# Altium PCB KlokWave.PcbDoc
Units mil, origin at the board's own origin, x right, y up, seen from the top; angles counter-clockwise.
Board outline 9135 x 4645 mil, 2 copper layers (Top Layer, Bottom Layer); 115 components, 91 nets, 369 pads, 13 vias.
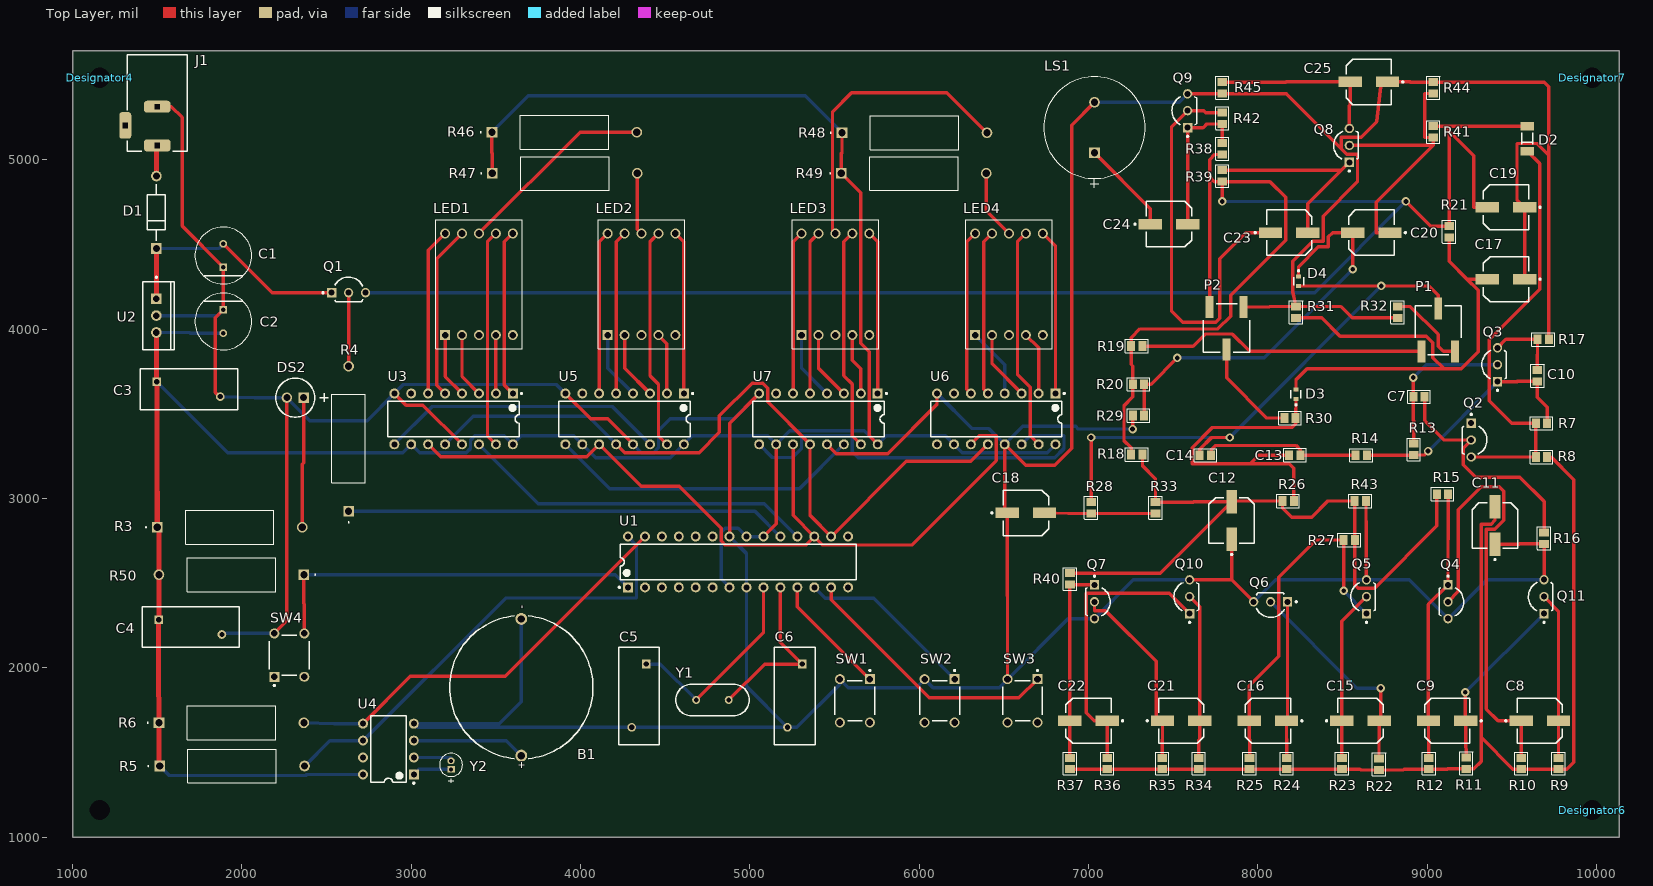
[diagram p0: Top Layer view]
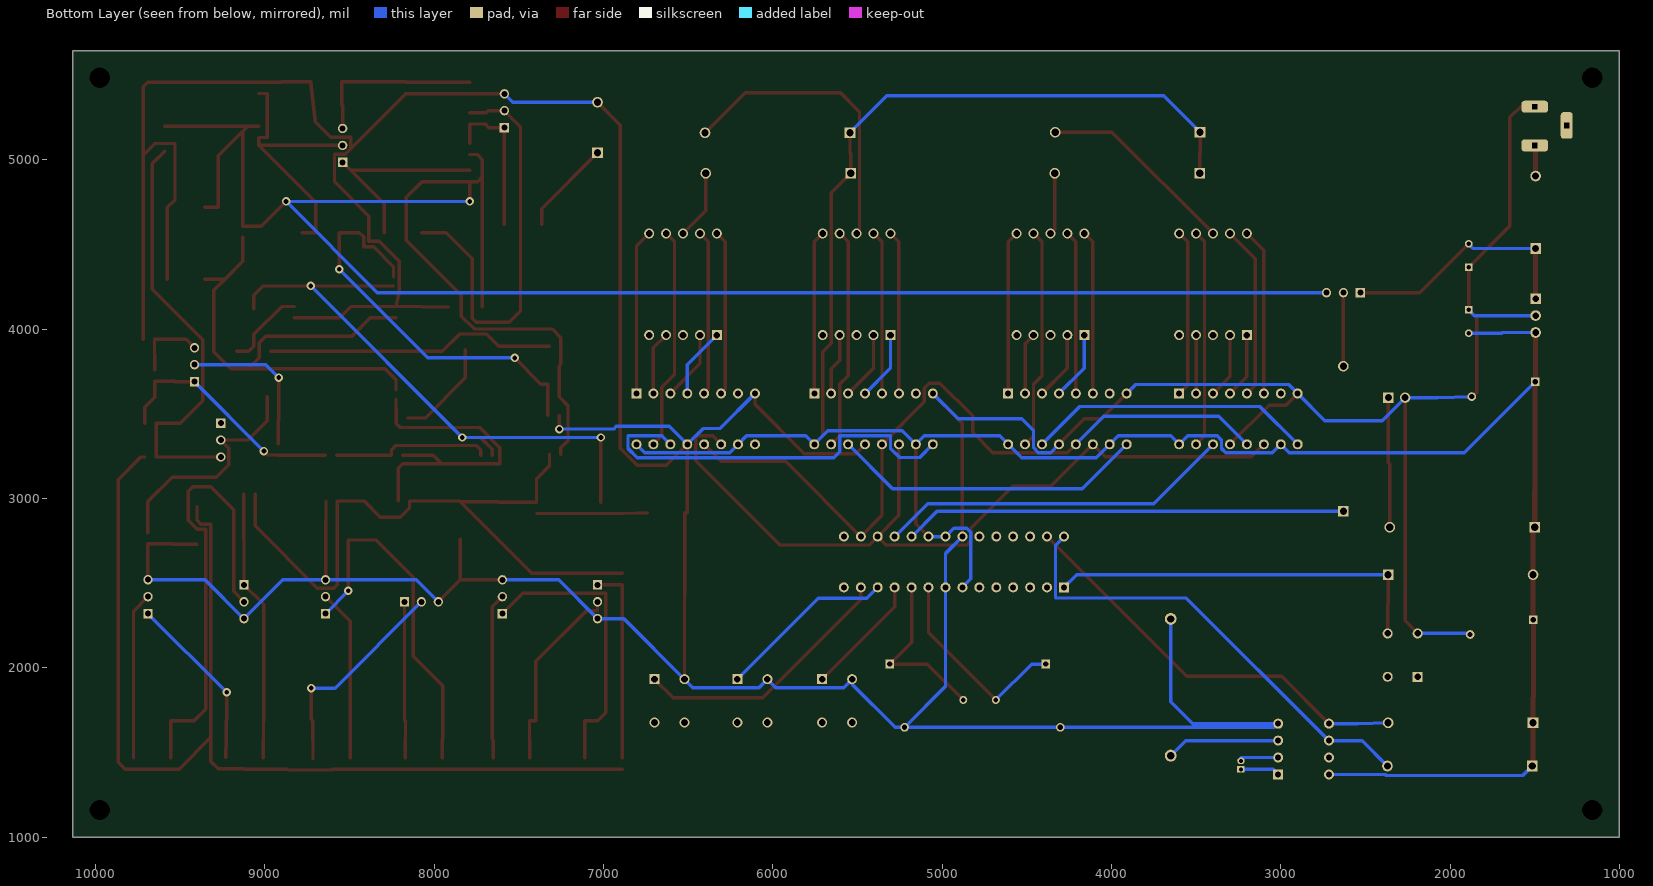
[diagram p1: Bottom Layer view, seen from below]

## Layer stack, top to bottom
Top Solder: solder mask 0.4, Solder Resist, Dk 3.5
Top Layer: signal copper 1.4
Dielectric 1: dielectric 12.6, FR-4, Dk 4.8
Bottom Layer: signal copper 1.4
Bottom Solder: solder mask 0.4, Solder Resist, Dk 3.5

## Board outline
1000,1000 10135,1000 10135,5645 1000,5645

## Design rules (kind name [scope] priority, off if disabled: settings)
Clearance Clearance_1 [All] p1: gap=10 ignorepadtopadclearanceinfootprint=FALSE
Clearance [All] p2: gap=10 ignorepadtopadclearanceinfootprint=FALSE
PolygonConnect [All] p1: connectstyle=Relief reliefconductorwidth=10 reliefentries=4 polygonreliefangle="90 Angle" airgapwidth=10
RoutingVias [All] p1: holewidth=28 width=50 viastyle="Through Hole" minholewidth=28 minwidth=50 maxholewidth=28 maxwidth=50
SilkToSolderMaskClearance [IsText] p1: minsilkscreentomaskgap=10 clearancetoexposedcopper=TRUE
SolderMaskExpansion [All] p1: expansion=4 istentingtop=FALSE
SupplyNets "Schematic Supply Nets_1" [InNet('VCC')] p1: voltage=0.000
SupplyNets "Schematic Supply Nets" [InNet('GND')] p2: voltage=0.000
Width [All] p1: maxlimit=30 minlimit=20 preferedwidth=20 minimp=50.000000 maximp=50.000000 favimp=50.000000
29 further rules are at their usual default settings.

## Classes and differential pairs
component class KlokWave.Wave: C7 C8 C9 C10 C11 C12 C13 C14 C15 C16 C17 C18 C19 C20 C21 C22 C23 C24 C25 D2 D3 D4 LS1 P1 P2 Q2 Q3 Q4 Q5 Q6 Q7 Q8 Q9 Q10 Q11 R7 R8 R9 R10 R11 R12 R13 R14 R15 R16 R17 R18 R19 R20 R21 R22 R23 R24 R25 R26 R27 R28 R29 R30 R31 R32 R33 R34 R35 R36 R37 R38 R39 R40 R41 R42 R43 R44 R45
component class KlokWave.Klok: B1 C1 C2 C3 C4 C5 C6 D1 DS2 J1 Q1 R3 R4 R5 R6 U1 U2 U3 U4 U5 U6 U7 Y1 Y2
component class KlokWave.Display: LED1 LED2 LED3 LED4 R46 R47 R48 R49 R50 SW1 SW2 SW3 SW4

## Components (designator, comment, footprint, x,y, rotation, side; value= is the part's Value field where it differs from the comment)
B1 "CR-2032/HFN" "THT 3VBAT: PANA-CR-2032HFN" 3650,1885 r90 top
C1 "16SEPC150MD" "THT PolCondensator FP-OS-CON-TH-E7-d_0_45-MFG" 1890,4435 r90 top
C2 "16SEPC150MD" "THT PolCondensator FP-OS-CON-TH-E7-d_0_45-MFG" 1890,4045 r270 top
C3 "565R30GASS33" "THT NonPol CerCOndensator: FP-565R30GASS33-MFG" 1685,3645 r0 top
C4 "565R30GASS33" "THT NonPol CerCOndensator: FP-565R30GASS33-MFG" 1695,2240 r0 top
C5 "565R30GASS33" "THT NonPol CerCOndensator: FP-565R30GASS33-MFG" 4345,1835 r270 top
C6 "565R30GASS33" "THT NonPol CerCOndensator: FP-565R30GASS33-MFG" 5265,1835 r270 top
C7 "CL21C221FBANNNC" "SMD RES: 0805ph" 8951.54,3600 r180 top
C8 "FP-OS-CON-SMT-C6-MFG" "SMD Elco pol: FP-OS-CON-SMT-C6-MFG" 9665,1686.88 r0 top
C9 "FP-OS-CON-SMT-C6-MFG" "SMD Elco pol: FP-OS-CON-SMT-C6-MFG" 9117.83,1686.88 r180 top
C10 "CL21C221FBANNNC" "SMD RES: 0805ph" 9650,3725 r90 top
C11 "FP-OS-CON-SMT-C6-MFG" "SMD Elco pol: FP-OS-CON-SMT-C6-MFG" 9400,2840 r90 top
C12 "FP-OS-CON-SMT-C6-MFG" "SMD Elco pol: FP-OS-CON-SMT-C6-MFG" 7845,2870 r90 top
C13 "CL21C221FBANNNC" "SMD RES: 0805ph" 8218.46,3256 r180 top
C14 "CL21C221FBANNNC" "SMD RES: 0805ph" 7690,3255 r180 top
C15 "FP-OS-CON-SMT-C6-MFG" "SMD Elco pol: FP-OS-CON-SMT-C6-MFG" 8606.09,1686.88 r0 top
C16 "FP-OS-CON-SMT-C6-MFG" "SMD Elco pol: FP-OS-CON-SMT-C6-MFG" 8058.91,1686.88 r180 top
C17 "FP-OS-CON-SMT-C6-MFG" "SMD Elco pol: FP-OS-CON-SMT-C6-MFG" 9465.24,4295 r180 top
C18 "FP-OS-CON-SMT-C6-MFG" "SMD Elco pol: FP-OS-CON-SMT-C6-MFG" 6629.76,2915 r0 top
C19 "FP-OS-CON-SMT-C6-MFG" "SMD Elco pol: FP-OS-CON-SMT-C6-MFG" 9465,4720 r180 top
C20 "FP-OS-CON-SMT-C6-MFG" "SMD Elco pol: FP-OS-CON-SMT-C6-MFG" 8670,4570 r180 top
C21 "FP-OS-CON-SMT-C6-MFG" "SMD Elco pol: FP-OS-CON-SMT-C6-MFG" 7547.17,1686.88 r0 top
C22 "FP-OS-CON-SMT-C6-MFG" "SMD Elco pol: FP-OS-CON-SMT-C6-MFG" 7000,1686.88 r180 top
C23 "FP-OS-CON-SMT-C6-MFG" "SMD Elco pol: FP-OS-CON-SMT-C6-MFG" 8185,4570 r0 top
C24 "FP-OS-CON-SMT-C6-MFG" "SMD Elco pol: FP-OS-CON-SMT-C6-MFG" 7475,4620 r0 top
C25 "FP-OS-CON-SMT-C6-MFG" "SMD Elco pol: FP-OS-CON-SMT-C6-MFG" 8655,5460 r180 top
D1 "1N4007-E3/53" "THT Diode FP-1N4007-E3-53-MFG" 1495,4690 r90 top
D2 "TMMBAT48FILM" "SMD Diode BAT48 FP-MINIMELF-MFG" 9590,5125 r90 top value=20pF
D3 "1N4148WT-7" "SMD Diode Rect: FP-SOD523-MFG" 8225,3615 r90 top
D4 "1N4148WT-7" "SMD Diode Rect: FP-SOD523-MFG" 8240,4282.56 r270 top
Designator4 "Comment" "M3 Hole" 1160,5485 r0 top
Designator6 "Comment" "M3 Hole" 9975,1160 r0 top
Designator7 "Comment" "M3 Hole" 9975,5485 r0 top
DS2 "HLMP-3301" "THT LED: AVAG-HLMP-3301-2" 2365,3595 r180 top
J1 "694108106102" "THT DC Power Jack: 694106301002" 1500,5335 r180 top
LED1 "SA56-11EWA" "THT 7Seg: LED10_SA56-11EWA_KNB" 3200,3965 r90 top
LED2 "SA56-11EWA" "THT 7Seg: LED10_SA56-11EWA_KNB" 4160,3965 r90 top
LED3 "SA56-11EWA" "THT 7Seg: LED10_SA56-11EWA_KNB" 5305,3965 r90 top
LED4 "SA56-11EWA" "THT 7Seg: LED10_SA56-11EWA_KNB" 6330,3965 r90 top
LS1 "CVS-1508" "THT speaker: CVS-1508_CUD" 7035,5041 r90 top locked
P1 "3361P-1-503GLF" "SMD POT: FP-3361P-MFG" 9065,3995 r0 top
P2 "3361P-1-503GLF" "SMD POT: FP-3361P-MFG" 7815,4005 r180 top
Q1 "BC547C" "THT NPN Transistor: ONSC-TO-92-3-29-11_AM_BL" 2630,4215 r0 top
Q2 "BC547C" "THT NPN Transistor: ONSC-TO-92-3-29-11_AM_BL" 9260,3345 r270 top
Q3 "BC547C" "THT NPN Transistor: ONSC-TO-92-3-29-11_AM_BL" 9415,3790 r90 top
Q4 "BC547C" "THT NPN Transistor: ONSC-TO-92-3-29-11_AM_BL" 9123.03,2390 r270 top
Q5 "BC547C" "THT NPN Transistor: ONSC-TO-92-3-29-11_AM_BL" 8640.98,2419.86 r90 top
Q6 "BC547C" "THT NPN Transistor: ONSC-TO-92-3-29-11_AM_BL" 8075,2390 r180 top
Q7 "BC547C" "THT NPN Transistor: ONSC-TO-92-3-29-11_AM_BL" 7035,2390 r270 top
Q8 "BC547C" "THT NPN Transistor: ONSC-TO-92-3-29-11_AM_BL" 8540,5085 r90 top
Q9 "BC547C" "THT NPN Transistor: ONSC-TO-92-3-29-11_AM_BL" 7585,5290 r90 top
Q10 "BC547C" "THT NPN Transistor: ONSC-TO-92-3-29-11_AM_BL" 7596.97,2419.86 r90 top
Q11 "BC547C" "THT NPN Transistor: ONSC-TO-92-3-29-11_AM_BL" 9690,2420 r90 top
R3 "AC03000003000JAC00" "THT Resistor: RES_AC03_VIS"#1 1500,2830 r0 top
R4 "AC03000003000JAC00" "THT Resistor: RES_AC03_VIS"#1 2630,2925 r90 top
R5 "AC03000003000JAC00" "THT Resistor: RES_AC03_VIS"#1 1514,1420 r0 top
R6 "AC03000003000JAC00" "THT Resistor: RES_AC03_VIS"#1 1510,1675 r0 top
R7 "CR0805-FX-22R6ELF" "SMD RES: 0805ph" 9675,3445 r0 top
R8 "CR0805-FX-22R6ELF" "SMD RES: 0805ph" 9675,3245 r180 top
R9 "CR0805-FX-22R6ELF" "SMD RES: 0805ph" 9775,1435 r90 top
R10 "CR0805-FX-22R6ELF" "SMD RES: 0805ph" 9555,1435 r90 top
R11 "CR0805-FX-22R6ELF" "SMD RES: 0805ph" 9230,1436.54 r90 top
R12 "CR0805-FX-22R6ELF" "SMD RES: 0805ph" 9010,1435 r90 top
R13 "CR0805-FX-22R6ELF" "SMD RES: 0805ph" 8920,3290 r90 top
R14 "CR0805-FX-22R6ELF" "SMD RES: 0805ph" 8610,3255 r180 top
R15 "CR0805-FX-22R6ELF" "SMD RES: 0805ph" 9090,3025 r180 top
R16 "CR0805-FX-22R6ELF" "SMD RES: 0805ph" 9690,2765 r270 top
R17 "CR0805-FX-22R6ELF" "SMD RES: 0805ph" 9685,3940 r0 top
R18 "CR0805-FX-22R6ELF" "SMD RES: 0805ph" 7285,3260 r180 top
R19 "CR0805-FX-22R6ELF" "SMD RES: 0805ph" 7285,3900 r0 top
R20 "CR0805-FX-22R6ELF" "SMD RES: 0805ph" 7295,3675 r0 top
R21 "CR0805-FX-22R6ELF" "SMD RES: 0805ph" 9130,4575 r270 top
R22 "CR0805-FX-22R6ELF" "SMD RES: 0805ph" 8715,1430 r90 top
R23 "CR0805-FX-22R6ELF" "SMD RES: 0805ph" 8496.36,1435 r90 top
R24 "CR0805-FX-22R6ELF" "SMD RES: 0805ph" 8170,1435 r90 top
R25 "CR0805-FX-22R6ELF" "SMD RES: 0805ph" 7950.91,1435 r90 top
R26 "CR0805-FX-22R6ELF" "SMD RES: 0805ph" 8178.46,2985 r0 top
R27 "CR0805-FX-22R6ELF" "SMD RES: 0805ph" 8540,2755 r0 top
R28 "CR0805-FX-22R6ELF" "SMD RES: 0805ph" 7015,2945 r270 top
R29 "CR0805-FX-22R6ELF" "SMD RES: 0805ph" 7295,3490 r180 top
R30 "CR0805-FX-22R6ELF" "SMD RES: 0805ph" 8190,3475 r180 top
R31 "CR0805-FX-22R6ELF" "SMD RES: 0805ph" 8225,4100 r90 top
R32 "CR0805-FX-22R6ELF" "SMD RES: 0805ph" 8825,4100 r270 top
R33 "CR0805-FX-22R6ELF" "SMD RES: 0805ph" 7395,2945 r270 top
R34 "CR0805-FX-22R6ELF" "SMD RES: 0805ph" 7650,1435 r90 top
R35 "CR0805-FX-22R6ELF" "SMD RES: 0805ph" 7435,1435 r90 top
R36 "CR0805-FX-22R6ELF" "SMD RES: 0805ph" 7110,1435 r90 top
R37 "CR0805-FX-22R6ELF" "SMD RES: 0805ph" 6890,1435 r90 top
R38 "CR0805-FX-22R6ELF" "SMD RES: 0805ph" 7790,5065 r270 top
R39 "CR0805-FX-22R6ELF" "SMD RES: 0805ph" 7790,4905 r270 top
R40 "CR0805-FX-22R6ELF" "SMD RES: 0805ph" 6890,2525 r90 top
R41 "CR0805-FX-22R6ELF" "SMD RES: 0805ph" 9035,5165 r90 top
R42 "CR0805-FX-22R6ELF" "SMD RES: 0805ph" 7790,5245 r270 top
R43 "CR0805-FX-22R6ELF" "SMD RES: 0805ph" 8605,2985 r0 top
R44 "CR0805-FX-22R6ELF" "SMD RES: 0805ph" 9035,5425 r90 top
R45 "CR0805-FX-22R6ELF" "SMD RES: 0805ph" 7790,5425 r270 top
R46 "AC03000003000JAC00" "THT Resistor: RES_AC03_VIS"#1 3476.5,5162.5 r0 top
R47 "AC03000003000JAC00" "THT Resistor: RES_AC03_VIS"#1 3479,4920 r0 top
R48 "AC03000003000JAC00" "THT Resistor: RES_AC03_VIS"#2 5544,5160 r0 top
R49 "AC03000003000JAC00" "THT Resistor: RES_AC03_VIS"#1 5540,4920 r0 top
R50 "AC03000003000JAC00" "THT Resistor: RES_AC03_VIS"#1 2366,2550 r180 top
SW1 "1825910-6" "THT Button: TECO-1825910-6_V" 5620,1805 r270 top
SW2 "1825910-6" "THT Button: TECO-1825910-6_V" 6120,1805 r270 top
SW3 "1825910-6" "THT Button: TECO-1825910-6_V" 6610,1805 r270 top
SW4 "1825910-6" "THT Button: TECO-1825910-6_V" 2280,2075 r90 top
U1 "ATmega328P-PU" "THT ATMEGA328P-PU: 28P3" 4930,2625 r90 top
U2 "LM7805ACT" "THT LM7805: FAIR-TO-220-3" 1495,4080 r0 top
U3 "SN74HC595N" "THT 74HC595N: N0016A" 3250,3470 r270 top
U4 "DS1307+" "THT Chip DS1307: P8+2" 2865,1520 r180 top
U5 "SN74HC595N" "THT 74HC595N: N0016A" 4260,3470 r270 top
U6 "SN74HC595N" "THT 74HC595N: N0016A" 6455,3470 r270 top
U7 "SN74HC595N" "THT 74HC595N: N0016A" 5405,3470 r270 top
Y1 "16MHz" "THT 16 MHz: WE-XTAL_HC49/4H" 4778.94,1810 r180 top
Y2 "32.768KHZ" "THT 32 KHz OSC: XTAL_AB38T_ABR" 3235,1405 r90 top
? "Comment" "M3 Hole" 1160,1160 r0 top

## Footprints (in the part's own frame and the unit in brackets; to place one, negate y for a bottom-side part, rotate by r counter-clockwise, add the part's x,y. Pads: shape width x height; smd on the part's side, far side on the other; paste and mask are expansions set on the pad)
"M3 Hole" [mm]
  round 1.3 hole 3.048 unplated paste-2539.97 mask+0: 1(0,0)
"SMD Diode BAT48 FP-MINIMELF-MFG" [mm]
  rect 1.25x2 smd paste+0 mask+0: 1(-1.875,0) 2(1.875,0)
  silkscreen extent -0.87,-0.81 0.87,0.81, body extent -2.6,-1.1 2.6,1.1, height 0.25
"SMD Diode Rect: FP-SOD523-MFG" [mm] "~ 2mm"
  rect 0.6x0.7 smd paste+0 mask+0: 1(-0.7,0) 2(0.7,0)
  silkscreen extent -1.7,-0.75 0.62,0.75, body extent -1.1,-0.53 1.1,0.53, height 0.25
"SMD Elco pol: FP-OS-CON-SMT-C6-MFG" [mm]
  rect 3.5x1.6 smd paste+0 mask+0: 1(-2.8,0) 2(2.8,0)
  silkscreen extent -5.22,-3.4 3.4,3.4, body extent -4.8,-3.65 4.8,3.65, height 0.25
"SMD POT: FP-3361P-MFG" [mm]
  rect 1.19x3.3 smd paste+0 mask+0: 1(-2.54,-3.2) 2(0,3.2) 3(2.54,-3.2)
  silkscreen extent -3.48,-3.69 3.48,3.6, body extent -3.58,-4.95 3.58,4.95, height 0.25
"SMD RES: 0805ph" [mm] "Chip Resistor, 2-Leads, Body 2.00x1.25mm, IPC Medium Density"
  rect 1.2x1.45 smd: 1(-0.85,0) 2(0.85,0)
  silkscreen extent -1.7,-1.02 1.7,0.99, body extent -1.1,-0.72 1.1,0.72, height 0.6
"THT 3VBAT: PANA-CR-2032HFN" [mm] "TH, 2-Leads, Dia 21.5mm"
  round 1.78 hole 1.1: 1(-10.25,0)
  oval 1.778x1.78 hole 1.1: 2(10.25,0)
  silkscreen extent -10.7,-10.75 10.7,10.75, body extent -10.75,-10.75 10.75,10.75, height 9.9
"THT 7Seg: LED10_SA56-11EWA_KNB" [mil]
  rect 59x59 / inner round 60 / far side rect 59x59 hole 39 paste-99999 mask+0: 1(0,0)
  oval 60x59 hole 39 paste-99999 mask+0: 2(0,-100)
  round 59 / inner round 60 / far side round 59 hole 39 paste-99999 mask+0: 3(0,-200) 4(0,-300) 5(0,-400) 6(600,-400) 7(600,-300) 8(600,-200) 9(600,-100) 10(600,0)
  silkscreen extent -80,-455 680,55, body extent -5,-450 610,50, height 320
"THT 16 MHz: WE-XTAL_HC49/4H" [mm] "Quartz Crystal, size HC49/4H, body 11.05x4.7mm"
  round 1.2 hole 0.7: 1(-2.44,0) 2(2.44,0)
  silkscreen extent -5.53,-2.35 5.53,2.35, body extent -5.52,-2.35 5.53,2.35, height 4.15
"THT 32 KHz OSC: XTAL_AB38T_ABR" [mil]
  rect 39x44 / inner round 60 / far side rect 39x44 hole 24 mask+0: 1(-5,0)
  oval 39x44 / inner round 60 / far side oval 39x44 hole 24 mask+0: 2(45,0)
  silkscreen extent -85,-68 90,68, body extent -42,-63 84,63, height 331
"THT 74HC595N: N0016A" [mm] "DIP, 16-Leads, Body 19.7x6.6mm, Pitch 2.54mm"
  rect 1.5x1.5 hole 0.9: 1(-3.81,8.89)
  round 1.5 hole 0.9: 2(-3.81,6.35) 3(-3.81,3.81) 4(-3.81,1.27) 5(-3.81,-1.27) 6(-3.81,-3.81) 7(-3.81,-6.35) 8(-3.81,-8.89) 9(3.81,-8.89) 10(3.81,-6.35) 11(3.81,-3.81) 12(3.81,-1.27) 13(3.81,1.27) 14(3.81,3.81) 15(3.81,6.35) 16(3.81,8.89)
  silkscreen extent -3.93,-9.85 2.65,10.32, body extent -3.95,-9.85 3.95,9.85, height 5.08
"THT ATMEGA328P-PU: 28P3" [mm] "28-Pin Plastic Dual In-Line Package (PDIP)"
  rect 1.5x1.5 hole 0.9: 1(-3.81,16.51)
  round 1.5 hole 0.9: 2(-3.81,13.97) 3(-3.81,11.43) 4(-3.81,8.89) 5(-3.81,6.35) 6(-3.81,3.81) 7(-3.81,1.27) 8(-3.81,-1.27) 9(-3.81,-3.81) 10(-3.81,-6.35) 11(-3.81,-8.89) 12(-3.81,-11.43) 13(-3.81,-13.97) 14(-3.81,-16.51) 15(3.81,-16.51) 16(3.81,-13.97) 17(3.81,-11.43) 18(3.81,-8.89) 19(3.81,-6.35) 20(3.81,-3.81) 21(3.81,-1.27) 22(3.81,1.27) 23(3.81,3.81) 24(3.81,6.35) 25(3.81,8.89) 26(3.81,11.43) 27(3.81,13.97) 28(3.81,16.51)
  silkscreen extent -3.93,-17.7 2.65,17.93, body extent -3.6,-17.65 3.6,17.65, height 4.58
"THT Button: TECO-1825910-6_V" [mm] "Switch, 4-Leads, Body 5.99x5.99mm"
  rect 1.5x1.5 hole 0.99: 1(-3.25,2.25)
  round 1.5 hole 0.99: 2(3.25,2.25) 3(-3.25,-2.25) 4(3.25,-2.25)
  silkscreen extent -4.67,-3 3,3, body extent -3,-2.99 2.99,3, height 5
"THT Chip DS1307: P8+2" [mm] "DIP, 8-Leads, Row Spacing 7.62mm, Pitch 2.54mm, Body 9.4x7mm"
  rect 1.5x1.5 hole 0.9: 1(-3.81,3.81)
  round 1.5 hole 0.9: 2(-3.81,1.27) 3(-3.81,-1.27) 4(-3.81,-3.81) 5(3.81,-3.81) 6(3.81,-1.27) 7(3.81,1.27) 8(3.81,3.81)
  silkscreen extent -3.94,-5 2.65,5.23, body extent -3.6,-4.95 3.6,4.95, height 4.57
"THT DC Power Jack: 694106301002" [mm] "DC Power Jack Right Angled(6.4)"
  rrect50% 4x1.8 hole 0.8 square: 1(0,6.35) 2(0,0.55)
  rrect50% 1.8x4 hole 0.8 square: 3(4.8,3.35)
  silkscreen extent -4.5,-7.25 4.5,7.25, body extent -4.5,-7.25 5,7.25, height 10.75
"THT Diode FP-1N4007-E3-53-MFG" [mm]
  rect 1.6x1.6 hole 1.05: 1(-5.438,0)
  round 1.6 hole 1.05: 2(5.438,0)
  silkscreen extent -4.24,-1.35 4.24,1.35, body extent -6.34,-1.45 6.34,1.45, height 0.25
"THT LED: AVAG-HLMP-3301-2" [mm] "THD, 2-Leads, Body Dia 5.85mm"
  rect 1.55x1.55 hole 1.05: 1(0,0)
  round 1.55 hole 1.05: 2(2.54,0)
  silkscreen extent -3.68,-2.92 4.19,2.92
"THT LM7805: FAIR-TO-220-3" [mm] "FM, 3-Leads, Body 10.2x4.7mm, Pitch 2.54mm"
  rect 1.6x1.6 hole 1: 1(0,2.54)
  round 1.6 hole 1: 2(0,0) 3(0,-2.54)
  silkscreen extent -2.04,-5.1 2.66,5.87, body extent -2.04,-5.1 2.66,5.1, height 18.95
"THT NonPol CerCOndensator: FP-565R30GASS33-MFG" [mm]
  rect 1.3x1.3 hole 0.8: 1(-4.75,1.1)
  round 1.3 hole 0.8: 2(4.75,-1.1)
  silkscreen extent -7.24,-3.05 7.37,3.05, body extent -7.24,-3.15 7.37,3.15, height 0.25
"THT NPN Transistor: ONSC-TO-92-3-29-11_AM_BL" [mm] "TO, 3-Leads, Body Dia 4.7mm, Pitch 2.54mm"
  rect 1.4x1.4 hole 0.9: 1(-2.54,0)
  round 1.4 hole 0.9: 2(0,0) 3(2.54,0)
  silkscreen extent -3.97,-1.34 2.13,2.35, body extent -2.84,-1.34 2.84,2.35, height 5.33
"THT PolCondensator FP-OS-CON-TH-E7-d_0_45-MFG" [mm]
  rect 1.15x1.15 hole 0.65: 1(-1.75,0)
  round 1.15 hole 0.65: 2(1.75,0)
  silkscreen extent -4.25,-4.25 4.25,4.25, body extent -4.35,-4.35 4.35,4.35, height 0.25
"THT Resistor: RES_AC03_VIS"#1 [mil]
  rect 63x63 / inner round 60 / far side rect 63x63 hole 43: 1(0,0)
  round 63 / inner round 60 / far side round 63 hole 43: 2(856,0)
  silkscreen extent -69,-100 689,100, body extent -16,-95 873,95, height 189
"THT Resistor: RES_AC03_VIS"#2 [mil]
  rect 63x63 hole 43: 1(0,0)
  round 63 hole 43: 2(856,0)
  silkscreen extent -69,-100 689,100, body extent -16,-95 873,95, height 189
"THT speaker: CVS-1508_CUD" [mil]
  rect 63x63 hole 43: 1(0,0)
  round 63 hole 43: 2(299,0)
  silkscreen extent -206,-300 450,300, body extent -146,-295 446,295, height 296

## Part data
B1: library part CMP-2000-05296-1, "Coin Cell Battery, 225 mAh, 0.2 mA, 3 V, -30 to 60 degC, Bulk", Battery Capacity=220mAh, Battery Voltage=3V, Manufacturer=Panasonic, Battery IEC Code=CR2032, Battery NEDA Code=5004LC, Battery Size Code=2032, Battery Technology=LithiumManganeseDioxide, Battery Terminals=PCBPins, Datasheet URL=https://datasheet.ciiva.com/3/aaa4000de87-3072.pdf, Datasheet Version="Rev. 0, 05/2010", External Depth=-, External Diameter=20mm, External Height=3.2mm, External Width=-, Manufacturer URL=http://www.panasonic.com/, Product Range=-, SVHC=1,2-dimethoxyethane,ethyleneglycoldimethylether(EGDME)(15-Jun-2015), Weight=2.9g
C1 C2: library part CMP-05428-000489-1, "Conductive Polymer Aluminum Solid Capacitors (OS-CON) 150uF ±20% 16V RADIAL TH 8x7mm", Capacitance=150uF, Case/Package=Radial, ESR (Equivalent Series Resistance)=22mR, Leakage Current=500uA, Max Operating Temperature=105°C, Min Operating Temperature=-55°C, Package Quantity=200, Ripple Current=3.22A, Tolerance=20%, Voltage=16V, Diameter=8mm, Dissipation Factor=12%, Height=7mm, Height - Seated (Max)=0.276inch, Lead Diameter=0.45mm, Lead Free="Lead Free", Lead Pitch=3.5mm, Length=7mm, Life (Hours)=5000Hour, Mount="Through Hole", Number of Pins=7, Packaging=Bulk, Polarity=Polar, REACH SVHC="No SVHC", RoHS Compliant=Yes, Series="OS-CON™, SEPC", Termination=Radial, Voltage Rating=16V, Voltage Rating (DC)=16V
C3 C4 C5 C6: library part CMP-00030-41968055-1, "565R30GASS33 33nF 3 kV dc THT Ceramic Single Layer Capacitor; Z5U Dielectric Radial 565R Series", Capacitance=33nF, Case/Package=Radial, Dielectric=Z5U, Max Operating Temperature=105°C, Min Operating Temperature=-25°C, Tolerance=20%, Voltage=3kV, Composition=Ceramic, Depth=6.1mm, Diameter=22.9mm, Height=22.9mm, Lead Diameter=640µm, Lead Free="Lead Free", Lead Pitch=9.52mm, Material=Ceramic, Mount=Radial, NexarPartId=41968055, Packaging=Bulk, RoHS=Compliant, Schedule B=8532230060, Termination=Radial, Voltage Rating=3kV, Voltage Rating (DC)=3kV
C7 C10 C13 C14: library part CMP-13271-000769-1, "SMD cap nonpol: CL21 Series 0805 220pF 50V ±1% Tolerance C0G Multilayer Ceramic Chip Capacitor", Capacitance=220pF, Case Code (Imperial)=0805, Case Code (Metric)=2012, Dielectric=C0G, Max Operating Temperature=125°C, Min Operating Temperature=-55°C, Package Quantity=1, Tolerance=1%, Voltage Rating=50V, Case/Package=0805, Depth=1.25mm, Height=0.65mm, Lead Free="Lead Free", Length=0.079inch, Material=Ceramic, Mount="Surface Mount", Packaging="Tape and Reel", Radiation Hardening=No, Thickness=0.03inch, Voltage Rating (DC)=50V, Width=0.049inch
C8 C9 C11 C12 C15 C16 C17 C18 C19 C20 C21 C22 C23 C24 C25: "SMD Elco Capacitor", Capacitance=680nF, Case Code (Imperial)=0805, Case Code (Metric)=2012, Dielectric Material=Tantalum, ESR (Equivalent Series Resistance)=25R, Leakage Current=500nA, Max Operating Temperature=125°C, Min Operating Temperature=-55°C, Package Quantity=2500, Tolerance=10%, Voltage Rating=16V, Case/Package=0805, Construction=Flat, Depth=1.3mm, Dissipation Factor=4%, Features="General Purpose", Height=1.2mm, Height - Seated (Max)=0.047inch, Lead Free="Lead Free", Length=2.05mm, Mount="Surface Mount", Packaging="Tape and Reel", Radiation Hardening=No, REACH SVHC="No SVHC", RoHS Compliant=Yes, Series=TAJ, Termination=SMD/SMT, Voltage Rating (DC)=16V, Weight=0.000194oz, Width=1.3mm
D1: library part CMP-02540-000066-1, "1N4007 DIODE GEN PURP 1KV 1A DO204AL", Average Rectified Current=1A, Case/Package=DO-41, Max Operating Temperature=150°C, Max Repetitive Reverse Voltage (Vrrm)=1kV, Max Reverse Current=5uA, Max Surge Current=45A, Min Operating Temperature=-50°C, Package Quantity=3000, Contact Plating=Tin, Element Configuration=Single, Max Reverse Voltage (DC)=1kV, Mount="Through Hole", Number of Pins=2, Packaging="Tape and Reel", Peak Non-Repetitive Surge Current=45A, Radiation Hardening=No, Reverse Voltage=1kV, Series=-
D2: library part CMP-12187-000003-1, "Rectifier Diode BAT48 SCHOTTKY 40V 350MA MINMELF", Capacitance=20pF, Forward Current=350mA, Manufacturer=STMicroelectronics, Max Junction Temp=+125°C, Max Repetitive Reverse Voltage=40V, Max Surge Forward Current=1.5A, Package=MINIMELF, Peak Reverse Current=25uA, Temperature="-65°C to +125°C", Temperature Range Low=-65°C, Automotive=No, Category=Diode, ComponentLink2Description=Datasheet, ComponentLink2URL=https://www.st.com/resource/en/datasheet/tmmbat48.pdf, Device Class L1="Discrete Semiconductors", Device Class L2=Diodes, Device Class L3="Schottky Diodes", Digikey Description="DIODE SCHOTTKY 40V 350MA MINMELF", Height=1.62mm, Lead Free=Yes, Manufacturer Part Number=TMMBAT48FILM, Mouser Description="Schottky Diodes & Rectifiers 350mA 40 Volt", Octopart=https://octopart.com/tmmbat48film-stmicroelectronics-324396, Reverse Voltage=40V, RoHS=TRUE, Temperature Range High=+125°C
D3 D4: library part CMP-2000-05518-3, "Rectifier Diode 1N4148 GEN PURP 80V 125MA SOD523", Average Rectified Current=125mA, Capacitance=2pF, Forward Current=250mA, Forward Voltage=1.25V, Max Forward Surge Current (Ifsm)=2A, Max Operating Temperature=150°C, Max Repetitive Reverse Voltage (Vrrm)=100V, Max Reverse Voltage (DC)=80V, Min Operating Temperature=-65°C, Package Quantity=3000, Peak Reverse Current=1uA, Power Dissipation=150mW, Contact Plating=Tin, Current Rating=125mA, Element Configuration=Single, Height=0.65mm, Lead Free="Lead Free", Length=0.9mm, Max Surge Current=2A, Mount="Surface Mount", Number of Pins=2, Output Current=125mA, Packaging="Tape and Reel", Peak Non-Repetitive Surge Current=2A, Polarity=Standard, Power Rating=150mW, Radiation Hardening=No, REACH SVHC="No SVHC", Recovery Time=4ns, Reverse Recovery Time=4ns, Voltage Rating (DC)=80V, Weight=3.5E-05oz, Width=1.3mm
DS2: library part CMP-2000-06411-1, "T-1 3/4 (5 mm) Diffused LED Lamp, 1.9 V, -40 to 100 degC, 2-Pin THD", Emitting Color=Red, Forward Current=25mA, Forward Voltage=2.4V, Manufacturer=Avago, Operating Temp Range=-40Cto100C, Operating Temperature Classification=Industrial, Package Description="2-Pin Through Hole LED, Dia 5.85 mm", Package Type=T-13/4, Power Dissipation=85W, Reverse Voltage=5V, Test Current (It)=10mA, Chip Material=GaP, Datasheet URL=http://www.avagotech.com/docs/AV02-1558EN, Datasheet Version=03/2015, DELETED=Compliant, Dominant Wave Length=626nm, High Brightness=No, Lens Dimensions=5.08x5.08x8.3mm, Lens Type=ColoredDiffused, Lum Intensity=5.4mcd, Luminous Intensity=5.4mcd, Main Category=StandardLED, Manufacturer URL=http://www.avagotech.com/, Mounting=ThroughHole, Mounting Technology=ThroughHole, Number of  Elements=1, Package Reference=HLMP-3301, Packaging=TapeandReel, Peak Wavelength=635nm, Pin Count=2, Product Depth (mm)=6.1mm, Product Height (mm)=9.19mm, Product Length (mm)=6.1mm, Rad Hardened=No, Shape Type=Circular, Type=Uni-Color, Viewing Angle=60deg
J1: library part CMP-1502-00180-2, "DC Power JAck", Color=Black, Current Rating=5A, Flammability Rating="UL94 V-0", Insulation Resistance=100MΩ, Max Operating Temperature=85°C, Min Operating Temperature=-40°C, Operating Supply Voltage=24V, Connector Type=Power, Contact Gender=Female, Contact Plating=Tin, Gender=Male, Housing Material=Polyamide, Mount="Surface Mount", NexarPartId=52645186, Packaging="Tape and Reel", REACH SVHC=Unknown, RoHS=Compliant, Shielding=Unshielded, Termination=SMD/SMT, Voltage Rating=24V, Voltage Rating (DC)=24V
LED1 LED2 LED3 LED4: "THT CA 7SegDisplay", Mfr_Name=Kingbright, RefDes=RefDes, Type=Type
LS1: "THT Speaker", Mfr_Name="Same Sky", RefDes=RefDes, Type=Type
P1 P2: library part CMP-07234-000057-1, "SMD TRIMMER 50K OHM 0.5W GW TOP ADJ", Color=Natural, Max Operating Temperature=125°C, Max Power Dissipation=500mW, Min Operating Temperature=-55°C, Package Quantity=1, Resistance=50kR, Resistance Tolerance=10%, Resistor Type=Cermet, Temperature Coefficient=100ppm/°C, Voltage Rating=300V, Contact Plating=Tin, Depth=8.53mm, Height=0.205inch, Lead Free="Lead Free", Length=6.71mm, Military Standard=Not, Mount="Surface Mount", Number of Turns=1, Packaging="Tape and Reel", Power Rating=500mW, Radiation Hardening=No, Reach SVHC Compliant=Yes, RoHS Compliant=Yes, Series=3361, Taper=Linear, Technology=CERMET, Termination="Gull Wing", Tolerance=10%, Voltage Rating (DC)=300V, Weight=0.567g, Width=0.264inch
Q1 Q2 Q3 Q4 Q5 Q6 Q7 Q8 Q9 Q10 Q11: library part CMP-1048-01437-1, "BC547C: THT Amplifier Transistor, NPN Silicon, 3-Pin TO-92, Bulk Box", Manufacturer="On Semiconductor", ComponentLink1Description="Manufacturer URL", ComponentLink1URL=http://www.onsemi.com/, ComponentLink2Description=Datasheet, ComponentLink2URL=http://www.onsemi.com/pub_link/Collateral/BC546-D.PDF, ComponentLink3Description="Package Specification", ComponentLink3URL=http://www.onsemi.cn/pub_link/Collateral/2N6426-D.PDF, DatasheetVersion="Rev. 7", fT Min (MHz)=150, IC Continuous (A)=0.1, Mounting Technology="Through Hole", PackageDescription="3-Pin Transistor Outline, Body 4.825 x 3.685 mm, Pitch 1.27 mm", PackageReference=TO-92-3-29-11_AM_SL, PackageVersion="Rev. AM", Packing="Bulk Box", PartNumber=BC547C, Polarity=NPN, RoHS=FALSE
R3 R4 R5 R6 R46 R47 R48 R49 R50: library part CMP-00030-39746760-1, "AC03000003000JAC00 Res Wirewound THT", Case/Package=Axial, Max Operating Temperature=275°C, Max Power Dissipation=3W, Min Operating Temperature=-40°C, Resistance=300Ω, Temperature Coefficient=-80ppm/°C, Tolerance=5%, Voltage Rating=30V, Composition=Wirewound, Contact Plating=Tin, Diameter=4.8mm, Features="Flame Retardant Coating", Lead Diameter=800µm, Length=13mm, Military Standard=Not, NexarPartId=39746760, Number of Pins=2, Number of Terminations=2, Packaging="Cut Tape (CT)", Power Rating=3W, REACH SVHC=Unknown, RoHS=Compliant, Schedule B="8533210080, 8533210080|8533210080|8533210080|8533210080|8533210080", Termination=Axial, Thickness=4.8006mm, Voltage Rating (DC)=30V, Width=4.8mm
R7 R8 R9 R10 R11 R12 R13 R14 R15 R16 R17 R18 R19 R20 R21 R22 R23 R24 R25 R26 R27 R28 R29 R30 R31 R32 R33 R34 R35 R36 R37 R38 R39 R40 R41 R42 R43 R44 R45: library part CMP-07231-006076-1, "Thick Film Chip Resistors 0805 22.6Ω 0.125W 1% 100ppm/°C", Case Code (Imperial)=0805, Case Code (Metric)=2012, Max Operating Temperature=155°C, Max Power Dissipation=125mW, Min Operating Temperature=-55°C, Package Quantity=5000, Resistance=22.6R, Resistor Type="Thick Film", Temperature Coefficient=100ppm/°C, Tolerance=1%, Voltage Rating=150V, Case/Package=0805, Construction=Rectangular, Contact Plating=Tin, Depth=1.25mm, Features="Moisture Resistant", Height=0.024inch, Length=2mm, Military Standard=Not, Mount="Surface Mount", Number of Terminations=2, Packaging="Tape and Reel", Power Rating=125mW, Radiation Hardening=No, Series=CR0805, Termination=SMD/SMT, Thickness=508um, Width=0.049inch
SW1 SW2 SW3 SW4: library part CMP-1684-00021-1, "THT Tact Switch, SPST-NO, 0.05 A, -35 to 85 degC, 4-Pin THD, RoHS, Bulk", Actuator Color=Black, Contact Rating @ Voltage=0.05A@24VDC, Dielectric Strength=500VAC, Manufacturer="TE Connectivity", Maximum AC Voltage Rating=N/A, Maximum Contact Resistance=100mOhm, Maximum DC Voltage Rating=24V, Minimum Insulation Resistance=100MOhm, Operating Temperature=-35to85C, Package Description="4-Pin Through Hole Device, Body 5.99 x 5.99 mm, Pitch 6.5 mm", Package Reference=THD, Actuator Length=1.4mm, Actuator Material=PolybutyleneTerephthalate, Actuator Style=RoundButton, Base Material=N/A, Body Orientation=Straight, Bushing Type=Unthreaded, Contact Material=CopperAlloy, Contact Plating=Silver, Datasheet URL=http://www.te.com/commerce/DocumentDelivery/DDEController?Action=showdoc&DocId=Customer+Drawing%7F1825910%7FC9%7Fpdf%7FEnglish%7FENG_CD_1825910_C9.pdf%7F1825910-6, Datasheet Version="Rev. C9", Dimension=5.99x5mm, Electrical Life=100000Cycles, Family=1825910, Function=MomentaryContact, Housing Material=N/A, Illumination=N/R, Manufacturer URL=http://www.te.com, Mechanical Life=100000Cycles, Mounting=ThroughHole, Packaging=N/A, Part No=1825910-6, Pole Throw Configuration=SPST, Product Weight=N/A, RoHS=Yes, Seal Description=N/A, Seal Location=N/A, Switch Configuration=OFF(ON), Terminal Type=PCPins, Thread Size=N/R
U1: library part CMP-0095-00013-2, "8-bit AVR Microcontroller, 32KB Flash, 1KB EEPROM, 2KB SRAM, 28-pin PDIP, Industrial Grade (-40°C to 85°C)", ComponentLink1Description="Manufacturer URL", ComponentLink1URL=http://www.atmel.com/, ComponentLink2Description="ATmega48A/48PA/88A/88PA/168A/168PA/328/328P Datasheet", ComponentLink2URL=http://www.atmel.com/dyn/resources/prod_documents/8271.pdf, ComponentLink3Description="ATmega48A/48PA/88A/88PA/168A/168PA/328/328P Summary", ComponentLink3URL=http://www.atmel.com/dyn/resources/prod_documents/8271S.pdf, DatasheetVersion="revD, May-2011", PackageDescription="28-lead (0.300\"/7.62mm Wide) Plastic Dual Inline Package (PDIP)", PackageReference=28P3, PackageVersion="revB, Sep-2001", RevisionNote="DatasheetVersion updated. URLs added."
U2: library part CMP-2000-04937-1, "Positive Voltage Regulator, 5 V, 1 A, 0 to 125 degC, 3-Pin TO-220, RoHS, Tube", Dropout Voltage Measurement Current=1A, Manufacturer=Fairchild, Maximum Input Voltage=35V, Maximum Operating Temperature=+125degC, Minimum Operating Temperature=0degC, Output Voltage=5V, Package Description="3-Pin Through Hole Device, Body 10 x 4.5 mm, Pitch 2.54 mm", Package Reference=TO-220, Quiescent Current=6mA, Typical Dropout Voltage @ Current=2V@1A, Datasheet URL=https://datasheet.ciiva.com/5816/1359194-5816420.pdf, Datasheet Version="Rev. 1.0.1, 05/2006", Dimensions=10.67x4.83x16.51mm, Height=16.51mm, Length=10.67mm, Line Regulation=50mV, Load Regulation=100mV, Manufacturer URL=https://www.fairchildsemi.com/, Maximum Output Current=1A, Mounting Type=ThroughHole, Number of Outputs=1, Output Type=Fixed, Package Type=TO-220, Package URL=https://www.fairchildsemi.com/package-drawings/TO/TO220B03.pdf, Pin Count=3, Polarity=Positive, Regulator Function=Linear, Series=LM78xx, Width=4.83mm
U3 U5 U6 U7: library part CMP-0780-00137-3, "8-Bit Shift Registers With 3-State Output Registers, N0016A, TUBE", F @ Nom Voltage(Max)(Mhz)=28, Generic Part Number=SN74HC595, ICC @ Nom Voltage(Max)(mA)=0.08, Manufacturer="Texas Instruments", Operating Temperature Range(C)="-40 to 85", Rating=Military, tpd @ Nom Voltage(Max)(ns)=34, Voltage(Nom)(V)=6, 3-State Output=Yes, Bits=8, Code_JEDEC=MS-001, DatasheetVersion=SCLS041H, Input Type=CMOS, Output Drive (IOL/IOH)(Max)(mA)=7.8/-7.8, Output Type=CMOS, PackageReference=N0016A, PackageVersion=http://www.ti.com/lit/ml/mpdi002c/mpdi002c.pdf, Technology Family=HC, VCC(Max)(V)=6, VCC(Min)(V)=2
U4: library part CMP-0254-00152-1, "64 x 8, Serial, I2C Real-Time Clock, 5.0V, 8-Pin PDIP, 0 to 70 degC, Pb-Free", Code_JEDEC=MS-001-AB, ComponentLink1Description="Manufacturer URL", ComponentLink1URL=http://www.maxim-ic.com, ComponentLink2Description=Datasheet, ComponentLink2URL=http://datasheets.maxim-ic.com/en/ds/DS1307.pdf, ComponentLink3Description="Package Specification", ComponentLink3URL=http://pdfserv.maxim-ic.com/package_dwgs/21-0043.PDF, DatasheetVersion=10-Feb-2008, PackageDescription="8-Pin Plastic Dual-In-Line, Narrow (0.3in), Pitch 2.54 mm, PDIP(N), Pb-Free", PackageReference=P8+2, PackageVersion="revE, 2011"
Y1: library part 830003240B, "THT Quartz Crystal, HC49/4H, 16MHz, +/-30ppm WE-XTAL", Case/Size Code=HC49/4H, Frequency Stability=+/-50ppm, Frequency Tolerance=+/-30ppm, Load Capacitance=30pF, Manufacturer="Wurth Elektronik", Operating Temperature Max=70°C, Operating Temperature Min=-20°C, Category=Crystals, ComponentLink1Description="Website Link", ComponentLink1URL=https://www.we-online.com/redexpert/article/830003240B?ad, ComponentLink2Description="Datasheet Link", ComponentLink2URL=https://www.we-online.com/redexpert/spec/830003240B?ad, Frequency=16MHz, Height=4.1mm, Length=11.05mm, Manufacturer Part Number=830003240B, Match Code=WE-XTAL, Mount="Through Hole", Packaging=Bulk, Width=4.7mm
Y2: library part AB38T-32.768KHZ, "THT CRYSTAL 32.7680KHZ 12.5PF TH", Mfr_Name=Abracon

## Via types
v1: diameter 50, hole 28, Top Layer to Bottom Layer, 13 vias

## Nets (pads, with @x,y where several pads share a name; then routed paths per layer and width w, separated by ;. In a path a pad name is that pad's centre, name@x,y a point inside that pad or via, vN(x,y) a via of type N, cw(c..) or ccw(c..) an arc to the next point about the centre after c; other vN are vias at no path point)
GND: B1.2 C1.1 C2.1 C3.2 C4.2 C5.2 C6.2 C11.1 C12.1 C17.1 C18.1 C19.1 C25.1 DS2.2 J1.2 LS1.2 P2.1 Q4.3 Q5.3 Q6.3 Q7.3 Q9.3 Q10.3 Q11.3 R16.2 R17.2 R29.2 R31.2 R32.2 R43.2 R44.2 R45.2 SW1.3 SW2.3 SW3.3 SW4.2 U1.8 U1.22 U2.2 U3.8 U3.13 U4.4 U5.8 U5.13 U6.8 U6.13 U7.8 U7.13 | length 34811.4
  Top Layer w20: J1.2 1583.65,5313.35 1647,5250 1647,4609.1 C1.1 C2.1 1843,4066.9 1843,3625.7 C3.2@1867.01,3601.69 ; SW4.2 2265,2276.53 DS2.2 ; U3.8 2969,3551 3069,3551 U3.13 ; U5.8 4060,3470 4160,3470 U5.13 ; U1.22 4880,3445 U7.8 ; U7.13 5510,3265 5813,3265 6105,3557 U6.8 ; SW3.3 6521.42,2423 6519.53,2424.89 C18.1 6505,2915 U6.13 6628.28,3196.72 6800,3196.72 6900,3296.72 6900,5205 LS1.2 ; v1(7260,3410) 7260.77,3410.77 7260.77,3489.23 R29.2 ; Q9.3 8167.56,5390 ; Q10.3 7845,2520 ; R45.2 8166.02,5391.54 8167.56,5390 ; C12.1 7845,2520 ; P2.1 8068,4130.98 8070.48,4133.46 R31.2 ; Q6.3 7845,2520 ; R43.2 8638.46,2867.02 8640.98,2864.5 Q5.3 ; R32.2 8557.93,4066.54 8491,4133.46 R31.2 ; C11.1 9544,2729.76 9545.77,2731.54 R16.2 Q11.3 ; C17.1 9575.47,4507 9575.24,4507.24 C19.1 9530,4765.24 9530,5096 9650,5096 9718.46,5027.54 ; R17.2 9718.46,5027.54 ; 8167.56,5390 8492,5065.56 ; R31.2 8206,4221 8206,4400 8324,4518 8385,4518 8385,4668 8588,4871 8588,5032.56 8525,5032.56 8492,5065.56 ; 8492,5065.56 8492,5133 8610,5133 8703,5226 8728,5460 C25.1 8899,5460 8900.54,5458.46 R44.2 9691.54,5458.46 9718.46,5431.54 9718.46,5027.54
  Bottom Layer w20: U2.2 1856.1,4080 C2.1 ; C3.2@1867.01,3601.69 C3.2 2075.69,3595 DS2.2 2400,3460 2740,3460 U3.8 2953,3673 3857,3673 U5.8 ; C4.2 1888.27,2202.95 SW4.2 ; B1.2 3650,1800 3520,1670 U4.4 3037.01,1647.99 C5.2 C6.2 ; U5.13 4359.53,3270.47 4431.47,3270.47 4460,3299 4460,3400 4530,3470 4905,3470 U7.8 ; U1.22 4980,2675 U1.8 4980,1889.68 C6.2 ; U6.8 6312,3413 6412,3413 U6.13 6611,3426 6923.44,3426 6939.44,3410 v1(7260,3410) ; LS1.2 7535,5340 Q9.3 ; Q10.3 7264.86,2519.86 Q7.3 6878.47,2290 SW3.3 6471.47,1883 6081.37,1883 SW2.3 5981.47,1883 5581.37,1883 SW1.3 5531.42,1901.42 5277.99,1647.99 C6.2 ; Q6.3 8104.86,2519.86 Q5.3 8893.17,2519.86 Q4.3 9353.03,2520 Q11.3
NetB1_1: B1.1 U4.3 | length 671.7
  Bottom Layer w20: U4.3 3561.46,1570 B1.1
NetC1_2: C1.2 D1.1 Q1.1 U2.1 | length 1462.2
  Top Layer w20: C1.2 2178.9,4215 Q1.1
  Top Layer w30: U2.1 D1.1
  Bottom Layer w20: D1.1 1862.01,4475.91 C1.2
NetC5_1: C5.1 U1.9 Y1.2 | length 1211.9
  Top Layer w20: Y1.2 5080,2207.13 U1.9
  Bottom Layer w20: C5.1 4470.87,2022.01 Y1.2
NetC6_1: C6.1 U1.10 Y1.1 | length 1027.3
  Top Layer w20: Y1.1 5087.01,2022.01 C6.1 5180,2150.32 U1.10
NetC7_1: C7.1 Q2.2 R16.1 | length 1379.4
  Top Layer w20: C7.1 8985,3460 9100,3345 Q2.2 9212,3297 9212,3200 9286,3126 9546,3126 9690,2982 R16.1
NetC7_2: C7.2 Q3.2 R13.2 | length 919.7
  Top Layer w20: v1(8918.07,3714) C7.2 8918.07,3461.93 8920,3460 R13.2
  Bottom Layer w20: v1(8918.07,3714) 8994.07,3790 Q3.2
NetC8_1: C8.1 Q4.2 R10.2 | length 2718
  Top Layer w20: Q4.2 9184,2450.97 9184,2934 9320,3070 9425,3070 9452,3043 9452,2870.66 9400,2818.66 9348.5,2818.66 9348.5,1756.38 9418,1686.88 C8.1 9554.76,1547.35 9555,1547.12 R10.2
NetC8_2: C8.2 Q11.2 R9.2 | length 987.1
  Top Layer w20: Q11.2 9775,2335 9775,1686.88 C8.2 9775.24,1577.24 9775,1577 R9.2
NetC9_1: C9.1 Q11.1 R11.2 | length 1043.9
  Top Layer w20: v1(9225,1855) 9225,1689.94 C9.1 9228.06,1579.94 R11.2
  Bottom Layer w20: v1(9225,1855) Q11.1
NetC9_2: C9.2 Q4.1 R12.2 R15.1 | length 1606.4
  Top Layer w20: R12.2 9010,1576 9007.59,1578.41 C9.2 9007,1686.88 9007,2373.97 Q4.1 9123.03,2757 9123.46,2757.43 R15.1
NetC10_1: C10.1 Q3.1 R7.2 R13.1 R14.1 | length 1459
  Top Layer w20: R14.1 8920,3255 R13.1 8981.54,3256.54 v1(9005,3280) ; Q3.1 9531,3690 9532.54,3691.54 C10.1 9650,3597.46 9708.46,3539 R7.2
  Bottom Layer w20: v1(9005,3280) Q3.1
NetC10_2: C10.2 Q3.3 R17.1 | length 439.4
  Top Layer w20: Q3.3 9465,3940 R17.1 9651.54,3849.54 9650,3848 C10.2
NetC11_2: C11.2 R8.1 R9.1 R10.1 R11.1 R12.1 R22.1 R23.1 R24.1 R25.1 R34.1 R35.1 R36.1 R37.1 | length 6545.6
  Top Layer w20: R37.1 R36.1 R35.1 R34.1 R25.1 R24.1 R23.1 8603,1401.54 8608,1396.54 R22.1 8860,1396.54 8865,1401.54 R12.1 9119,1401.54 9120.54,1403.07 R11.1 9275,1403.07 9318.5,1446.57 9318.5,1589.03 ; C11.2 9400,2871 9377.66,2848.66 9318.5,2848.66 9318.5,1589.03 ; R8.1 9731,3245 9865,3111 9865,1441.54 9825,1401.54 R9.1 R10.1 9506,1401.54 9318.5,1589.03
NetC12_2: C12.2 R15.2 R18.1 R26.1 R27.2 R33.1 R40.2 R43.1 | length 4056.2
  Top Layer w20: R40.2 7423.23,2558.46 C12.2 ; R18.1 7318.46,3193.54 7395,3117 R33.1 7619,2978.46 7620.77,2980.24 C12.2 ; R27.2 R27.2@8571.54,2755 ; R15.2 9056.54,2837.54 8689,2470 8593,2470 8571.54,2491.46 R27.2@8571.54,2755 ; C12.2 7845,2985 R26.1 8145,2945 8200,2890 8318,2890 8413,2985 R43.1 R27.2@8571.54,2755
NetC13_1: C13.1 C14.1 R14.2 | length 937.2
  Top Layer w20: C14.1 7723.46,3286.46 7750,3313 8225,3313 8251.93,3286.07 C13.1 8413,3256 8414,3255 R14.2
NetC13_2: C13.2 D3.1 R26.2 R30.1 | length 1966
  Top Layer w20: C13.2 8005,3256 7955,3206 ; R26.2 8211.93,3179.07 8185,3206 7955,3206 ; D3.1 8225,3531.54 8223.46,3530 R30.1 8223.46,3442.46 8200,3419 7731,3419 7612,3300 7612,3206 7955,3206
NetC14_2: C14.2 D4.2 P1.2 R28.1 | length 3634.8
  Top Layer w20: R28.1 v1(7015,3360) ; C14.2 7656.54,3290.54 7726,3360 v1(7834,3360) ; D4.2 v1(8729,4255) 9010,4255 9065,4200 P1.2
  Bottom Layer w20: v1(7015,3360) v1(7834,3360) v1(8729,4255)
NetC15_1: C15.1 Q5.2 R23.2 | length 1012.9
  Top Layer w20: R23.2 8496.36,1577 8495.85,1577.51 C15.1 8495,1686.88 8495,2273.87 Q5.2
NetC15_2: C15.2 Q6.2 R22.2 | length 1281.9
  Top Layer w20: R22.2 8715,1574 8716.32,1575.32 C15.2 8725,1695.56 v1(8725,1880)
  Bottom Layer w20: Q6.2 8585,1880 v1(8725,1880)
NetC16_1: C16.1 Q6.1 R24.2 | length 927.7
  Top Layer w20: R24.2 8170,1577 8169.15,1577.85 C16.1 8175,1686.88 Q6.1
NetC16_2: C16.2 Q5.1 R25.2 R27.1 | length 2104.6
  Top Layer w20: R25.2 7950.91,1576 7948.68,1578.23 C16.2 7948.68,1894.68 8123,2069 8123,2534 8344,2755 R27.1 v1(8506.54,2454.31)
  Bottom Layer w20: v1(8506.54,2454.31) Q5.1
NetC17_2: C17.2 D3.2 R21.2 R31.1 | length 3120
  Top Layer w20: D3.2 8225,3700 8290,3765 9100,3765 ; R31.1 8376.46,4066.54 8485,3958 8995,3958 9033,3920 9033,3832 9100,3765 ; R21.2 9130,4400 9235,4295 ; C17.2 9235,4295 ; 9100,3765 9200,3765 9301,3866 9301,4229 9235,4295
NetC18_2: C18.2 R28.2 R33.2 | length 655
  Top Layer w20: C18.2 6880.46,2911.54 R28.2 R33.2
NetC19_2: C19.2 D2.2 P2.3 Q1.3 R18.2 R19.1 R20.1 R21.1 R38.2 R39.2 R41.2 | length 13362
  Top Layer w20: R18.2 7251.54,3298.85 7209.19,3341.19 7209.19,3548.65 7261.54,3601 R20.1 7261.54,3782 7251.54,3792 R19.1 7251.54,3949 7303.54,4001 7764,4001 7839,4076 7839,4200 8164,4525 8164,4779 8071.46,4871.54 R39.2 ; P2.3 7715,4900 ; v1(7790,4754) R39.2 ; R38.2 7746.54,5031.54 7715,5000 7715,4900 ; v1(8874,4754) 9019.54,4608.46 R21.1 9130,5168.46 ; C19.2 9275,4720 9275,5023.46 9130,5168.46 ; D2.2 9300,5198.82 9130,5198.55 R41.2 9100,5198.46 9130,5168.46 ; 7715,4900 7743.46,4871.54 R39.2
  Bottom Layer w20: Q1.3 8335,4215 v1(8874,4754) v1(7790,4754)
NetC20_1: C20.1 Q8.2 R41.1 R44.1 | length 1633.5
  Top Layer w20: Q8.2 9035,5085 ; C20.1 8700,4570 8700,4750 9035,5085 ; R44.1 8986,5391.54 8986,5131.54 R41.1 9035,5085
NetC20_2: C20.2 D4.1 R20.2 R29.1 | length 2411.4
  Top Layer w20: R29.1 R20.2 7369,3675 v1(7524,3830) ; D4.1 8240,4369 8357.06,4486.06 8416.58,4486.06 8416.58,4545.58 8441,4570 C20.2 8560,4570 v1(8560,4353)
  Bottom Layer w20: v1(7524,3830) 8037,3830 v1(8560,4353)
NetC21_1: C21.1 Q7.2 R35.2 | length 1148.5
  Top Layer w20: Q7.2 7035,2338 7100,2338 7400,2038 7400,1686.88 C21.1 7436.94,1577.94 7435,1576 R35.2
NetC21_2: C21.2 Q10.2 R34.2 | length 979.7
  Top Layer w20: Q10.2 7657,2359.83 7657,1686.88 C21.2 7657.41,1580.41 7650,1573 R34.2
NetC22_1: C22.1 Q10.1 R36.2 | length 1727.1
  Top Layer w20: R36.2 7110,1577 7110.24,1577.24 C22.1 7034,1686.88 6987,1733.88 6987,2440 7476.83,2440 Q10.1
NetC22_2: C22.2 Q7.1 R37.2 R40.1 | length 1168.9
  Top Layer w20: R37.2 6890,1577 6889.76,1577.24 C22.2 6889.76,2089 6890,2089.24 R40.1 6961,2491.54 6962.54,2490 Q7.1
NetC23_1: C23.1 Q9.2 R42.1 | length 2471
  Top Layer w20: R42.1 7692.54,5278.46 7681,5290 Q9.2 7490,5195 7490,4105 7555,4040 7750,4040 7775,4065 7775,4416 7929,4570 C23.1
NetC23_2: C23.2 Q8.1 R39.1 | length 1220.2
  Top Layer w20: R39.1 8493.46,4938.46 ; C23.2 8295,4570 8295,4740 8493.46,4938.46 ; Q8.1 8493.46,4938.46
NetC24_1: C24.1 LS1.1 | length 557.6
  Top Layer w20: LS1.1 7364.76,4711.24 C24.1
NetC24_2: C24.2 Q9.1 R38.1 R42.2 | length 897.1
  Top Layer w20: C24.2 7585.24,4904 7585,4904.24 Q9.1 7676,5190 7697.54,5211.54 R42.2 R38.1
NetC25_2: C25.2 Q8.3 R45.1 | length 1032.4
  Top Layer w20: R45.1 8166,5458.46 8167.54,5460 C25.2 8544.76,5324.76 8540,5320 Q8.3
NetD1_2: D1.2 J1.1 | length 185.9
  Top Layer w20: J1.1@1495,5085 J1.1
  Top Layer w30: D1.2 J1.1@1495,5085
NetD2_1: D2.1 Q2.3 R7.1 R8.2 | length 2540
  Top Layer w20: Q2.3 R8.2 R7.1 9500,3445 9367,3578 9367,3937 9665,4235 9665,4978.18 9592,5051.18 D2.1
NetDS2_1: DS2.1 R3.2 | length 768.7
  Top Layer w20: R3.2 2356,3203 2365,3212 DS2.1
NetLED1_1: LED1.1 U3.4 | length 386.4
  Top Layer w20: LED1.1 3200,3720 U3.4
NetLED1_2: LED1.2 U3.3 | length 386.4
  Top Layer w20: LED1.2 3300,3720 U3.3
NetLED1_4: LED1.4 U3.2 | length 345
  Top Layer w20: U3.2 LED1.4
NetLED1_6: LED1.6 U3.1 | length 986.4
  Top Layer w20: U3.1 3550,3670 3550,4515 LED1.6
NetLED1_7: LED1.7 U3.15 | length 1286.4
  Top Layer w20: U3.15 3450,3370 3450,4515 LED1.7
NetLED1_8: LED1.8 R46.2 | length 1180
  Top Layer w20: LED1.8 3997.5,5162.5 R46.2
NetLED1_9: LED1.9 U3.5 | length 1027.4
  Top Layer w20: U3.5 3150.5,3669.5 3150.5,4415.5 LED1.9
NetLED1_10: LED1.10 U3.6 | length 986.4
  Top Layer w20: U3.6 3100,4465 LED1.10
NetLED2_1: LED2.1 U5.4 | length 407.1
  Bottom Layer w20: LED2.1 4160,3770 U5.4
NetLED2_2: LED2.2 U5.3 | length 407.1
  Top Layer w20: LED2.2 4260,3770 U5.3
NetLED2_4: LED2.4 U5.2 | length 365.7
  Top Layer w20: LED2.4 4510,3915 U5.2
NetLED2_6: LED2.6 U5.1 | length 965.7
  Top Layer w20: LED2.6 4610,4515 U5.1
NetLED2_7: LED2.7 U5.15 | length 1307.1
  Top Layer w20: LED2.7 4410,4515 4410,3726 4460,3676 4460,3370 U5.15
NetLED2_8: LED2.8 R47.2 | length 365.4
  Top Layer w20: R47.2 4335,4590 LED2.8
NetLED2_9: LED2.9 U5.5 | length 965.7
  Top Layer w20: U5.5 4210,4515 LED2.9
NetLED2_10: LED2.10 U5.6 | length 965.7
  Top Layer w20: U5.6 4110,4515 LED2.10
NetLED3_1: LED3.1 U7.4 | length 407.1
  Bottom Layer w20: LED3.1 5305,3770 U7.4
NetLED3_2: LED3.2 U7.3 | length 407.1
  Top Layer w20: LED3.2 5405,3770 U7.3
NetLED3_4: LED3.4 U7.2 | length 365.7
  Top Layer w20: LED3.4 5605,3817 5655,3767 U7.2
NetLED3_6: LED3.6 U7.1 | length 965.7
  Top Layer w20: LED3.6 5755,4515 U7.1
NetLED3_7: LED3.7 U7.15 | length 1307.1
  Top Layer w20: LED3.7 5555,4515 5555,3726 5605,3676 5605,3370 U7.15
NetLED3_8: LED3.8 R48.2 | length 1793.6
  Top Layer w20: LED3.8 5488,4565 5488,5285 5600,5397 6163,5397 R48.2
NetLED3_9: LED3.9 U7.5 | length 965.7
  Top Layer w20: U7.5 5355,4515 LED3.9
NetLED3_10: LED3.10 U7.6 | length 965.7
  Top Layer w20: U7.6 5255,4515 LED3.10
NetLED4_1: LED4.1 U6.4 | length 417.5
  Bottom Layer w20: LED4.1 6505,3790 U6.4
NetLED4_2: LED4.2 U6.3 | length 417.5
  Top Layer w20: LED4.2 6430,3795 U6.3
NetLED4_4: LED4.4 U6.2 | length 376.1
  Top Layer w20: LED4.4 6705,3890 U6.2
NetLED4_6: LED4.6 U6.1 | length 976.1
  Top Layer w20: LED4.6 6805,4490 U6.1
NetLED4_7: LED4.7 U6.15 | length 1317.5
  Top Layer w20: LED4.7 6580,4515 6580,3733 6655,3658 6655,3370 U6.15
NetLED4_8: LED4.8 R49.2 | length 410.5
  Top Layer w20: R49.2 6396,4699 LED4.8
NetLED4_9: LED4.9 U6.5 | length 976.1
  Top Layer w20: U6.5 6380,3645 6380,4515 LED4.9
NetLED4_10: LED4.10 U6.6 | length 976.1
  Top Layer w20: U6.6 6280,3645 6280,4515 LED4.10
NetP1_1: P1.1 R19.2 | length 1718.2
  Top Layer w20: R19.2 7617,3900 7688,3971 7850,3971 7952,3869 P1.1
NetP1_3: P1.3 R32.1 | length 489.7
  Top Layer w20: R32.1 8900,4133.46 9064.98,3968.49 9064.98,3900.02 9096,3869 P1.3
NetP2_2: P2.2 R30.2 | length 606.1
  Top Layer w20: P2.2 7815,3713 8053,3475 R30.2
NetQ1_2: Q1.2 R4.2 | length 434
  Top Layer w20: R4.2 Q1.2
NetR4_1: R4.1 U1.19 | length 2612.1
  Bottom Layer w20: R4.1 5030,2925 U1.19
NetR5_2: R5.2 U1.28 U4.6 | length 2754.6
  Bottom Layer w20: R5.2 2520,1570 U4.6 3557,2412 4330,2412 4330,2725 U1.28
NetR6_2: R6.2 U1.27 U4.5 | length 2471.8
  Top Layer w20: U4.5 2995,1950 3555,1950 U1.27
  Bottom Layer w20: R6.2 2546,1670 U4.5
NetR50_1: R50.1 SW4.4 U1.1 | length 2293.2
  Top Layer w20: R50.1 2366,2379.58 2368.58,2377 SW4.4
  Bottom Layer w20: R50.1 4205,2550 U1.1
NetSW1_1: SW1.1 U1.11 | length 719.6
  Top Layer w20: U1.11 5280,2361.53 SW1.1
NetSW2_1: SW2.1 U1.12 | length 1053.1
  Bottom Layer w20: U1.12 5445,2410 5731.53,2410 SW2.1
NetSW3_1: SW3.1 U1.13 | length 1577.8
  Top Layer w20: U1.13 5480,2402 6060,1822 6587.63,1822 SW3.1
NetU1_16: U1.16 U3.12 U5.12 U6.12 U7.12 | length 4484.6
  Top Layer w20: U5.12 4260,3270 4700,3270 4820,3390 4820,3488 5013,3681 5075,3681 5105,3651 5105,3570 U7.12 5355,2900 U1.16 5924,3219 6304,3219 U6.12
  Bottom Layer w20: U3.12 3365,3485 4045,3485 U5.12
NetU1_17: U1.17 U3.11 U5.11 U6.11 U7.11 | length 4867.5
  Top Layer w20: U3.11 3173,3247 4037,3247 U5.11 4359,3071 4584,3071 4830,2825 4830,2750 4855,2725 5330,2725 U1.17 ; U7.11 5255,2900 U1.17 ; U6.11 6355,3370 6455,3370 6455,3224 5956,2725 5430,2725 U1.17
NetU1_18: U1.18 U3.14 | length 2105.7
  Bottom Layer w20: U3.14 3751,2969 5086,2969 U1.18
NetU3_9: U3.9 U5.14 | length 1694.7
  Bottom Layer w20: U3.9 3123,3543 4187,3543 U5.14
NetU4_1: U4.1 Y2.1 | length 232.4
  Bottom Layer w20: U4.1 3045,1400 Y2.1
NetU4_2: U4.2 Y2.2 | length 240
  Bottom Layer w20: U4.2 3235,1470 Y2.2
NetU5_9: U5.9 U7.14 | length 1862
  Bottom Layer w20: U5.9 4172,3058 5293,3058 U7.14
NetU6_14: U6.14 U7.9 | length 2404.6
  Bottom Layer w20: U7.9 5133,3242 5250,3242 5305,3297 5305,3369.53 5604,3369.53 5605,3368.53 5605,3275 5640,3240 6800,3240 6855,3295 6855,3370 6655,3370 U6.14
VCC: C2.2 C3.1 C4.1 R3.1 R5.1 R6.1 R46.1 R47.1 R48.1 R49.1 R50.2 U1.7 U1.20 U1.21 U2.3 U3.10 U3.16 U4.8 U5.10 U5.16 U6.10 U6.16 U7.10 U7.16 | length 15723.9
  Top Layer w20: C3.1@1495,3691.3 C3.1 ; R3.1 R3.1@1510,2820 ; C4.1 C4.1@1510,2285.32 ; R5.1@1510,1441.5 R5.1 ; R46.1 3476.5,5042.5 3479,5040 R47.1 ; U1.20 5155,2850 U7.10 ; R48.1 5544,5042 5540,5038 R49.1 5655,4805 5655,3915.5 5705,3865.5 5705,3370 U7.16
  Top Layer w30: C3.1@1495,3691.3 U2.3 ; C3.1 1497.99,3261.01 R3.1 ; C4.1 1507.99,1981.01 R6.1 R5.1@1510,1441.5 ; C4.1@1510,2285.32 R50.2 R3.1@1510,2820
  Bottom Layer w20: U2.3 1692,3980 1695.9,3976.1 C2.2 ; C3.1 1916.3,3270 2950,3270 U3.10 3050,3270 3325,3270 3350,3295 3350,3344.53 3375,3369.53 3550.47,3369.53 U3.16 3650,3370 3960,3370 U5.10 4089.53,3240.47 4530.47,3240.47 U5.16 4660,3370 5105,3370 U7.10 5234.53,3399.53 5675.47,3399.53 U7.16 5805,3370 6155,3370 U6.10 6255,3270 6755,3270 U6.16 ; R5.1 1570,1364 2377,1364 2383,1370 U4.8 ; R46.1 3692,5378 5326,5378 R48.1 ; U1.7 4830,2525 4830,2800 4855,2825 4930,2825 U1.21 U1.20
pads on no net: ?.1 Designator4.1 Designator6.1 Designator7.1 J1.3 LED1.3 LED1.5 LED2.3 LED2.5 LED3.3 LED3.5 LED4.3 LED4.5 Q2.1 SW1.2 SW1.4 SW2.2 SW2.4 SW3.2 SW3.4 SW4.1 SW4.3 U1.2 U1.3 U1.4 U1.5 U1.6 U1.14 U1.15 U1.23 U1.24 U1.25 U1.26 U3.7 U4.7 U5.7 U6.7 U6.9 U7.7

## Text inside footprints (layer, text, board x,y; h text height)
B1: Top Assembly "+" at 3670,1400 h40 r90; Top Assembly "-" at 3670,2350 h40 r90; Top Overlay "+" at 3670,1400 h40 r90; Top Overlay "-" at 3670,2350 h40 r90
LED1: Mechanical 13 "*" at 3225,3887.5 h50 r90
LED2: Mechanical 13 "*" at 4185,3887.5 h50 r90
LED3: Mechanical 13 "*" at 5330,3887.5 h50 r90
LED4: Mechanical 13 "*" at 6355,3887.5 h50 r90